# Altium PCB parsa_nami.PcbDoc (part 2 of 3)
Units mm, origin at the board's own origin, x right, y up, seen from the top; angles counter-clockwise.
Board outline 98.55 x 75.06 mm, 2 copper layers (Top Layer, Bottom Layer); 28 components, 23 nets, 118 pads, 19 vias.
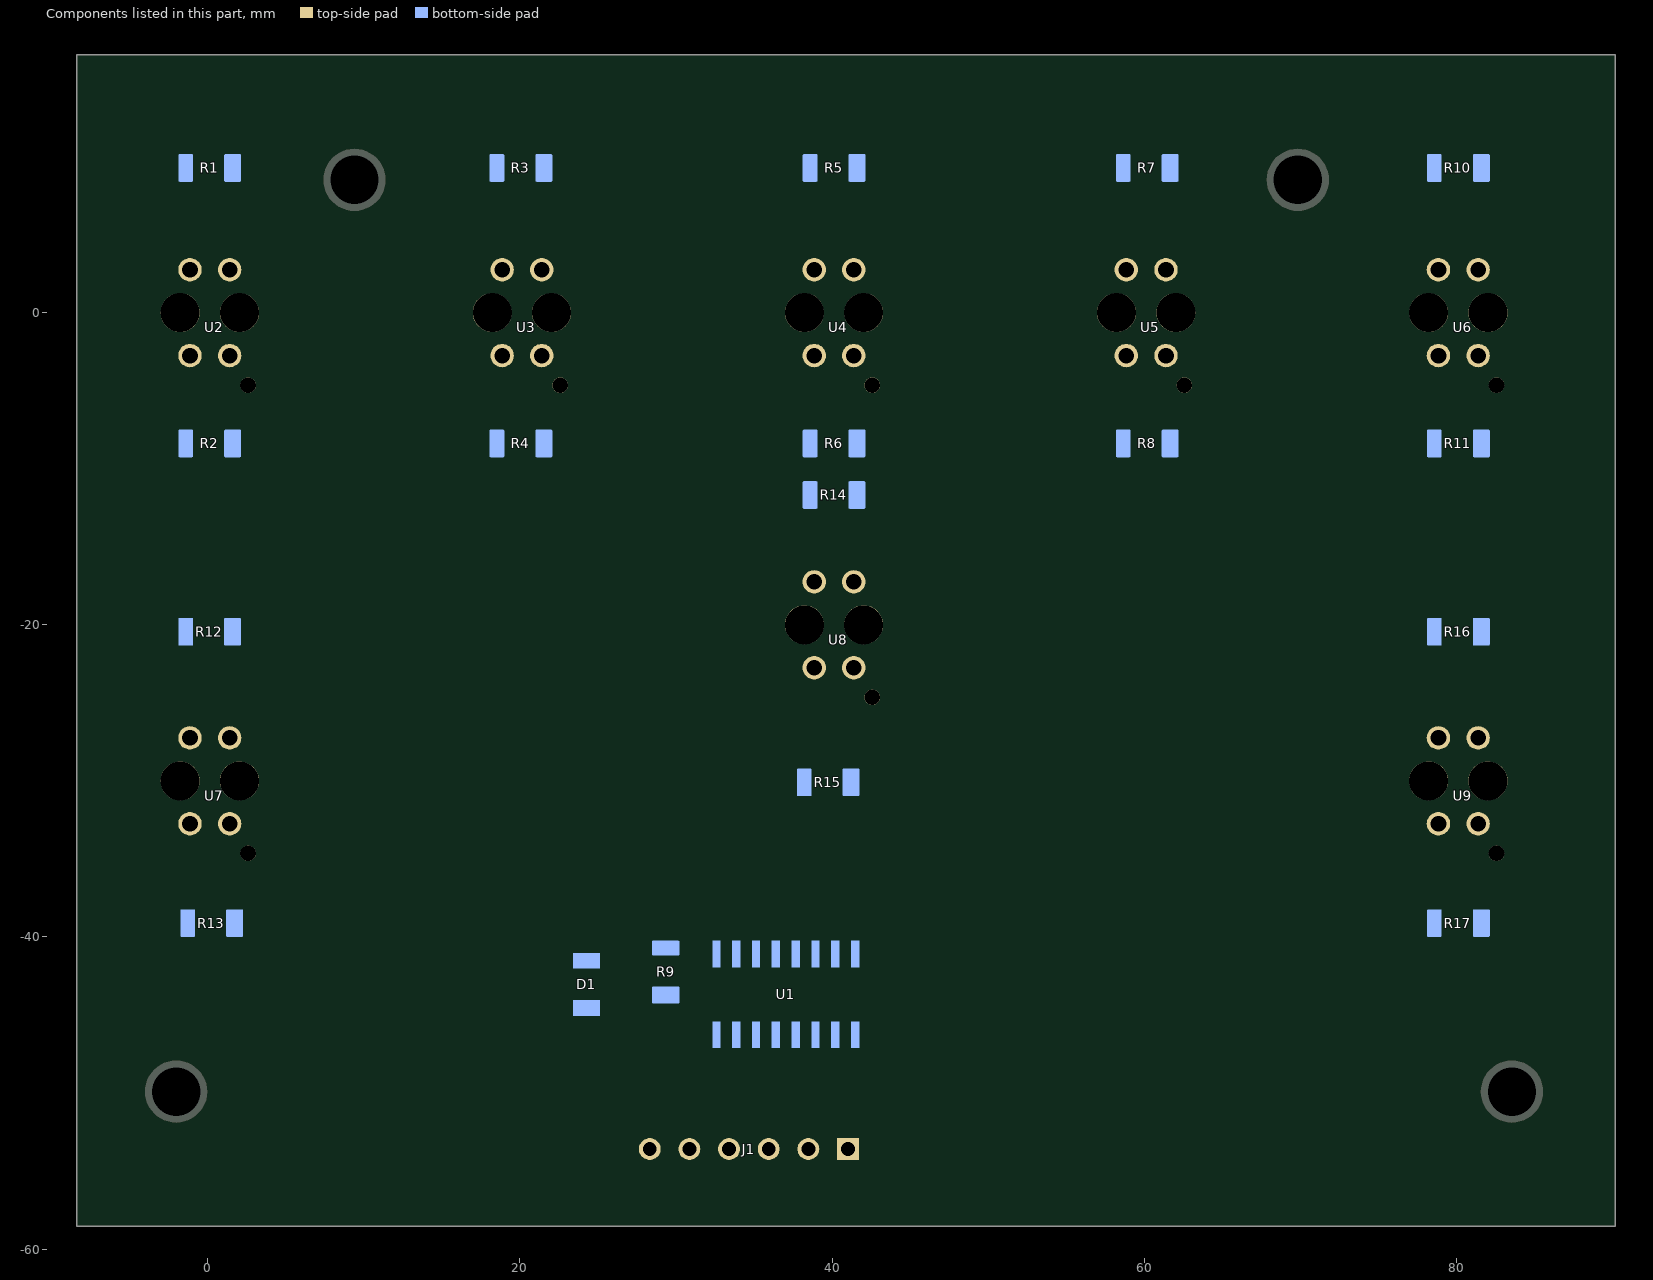
[diagram p2: the components of this part, seen from the top]

## Via types
v1: diameter 1.27, hole 0.711, Top Layer to Bottom Layer, 19 vias

## Nets (pads, with @x,y where several pads share a name; then routed paths per layer and width w, separated by ;. In a path a pad name is that pad's centre, name@x,y a point inside that pad or via, vN(x,y) a via of type N, cw(c..) or ccw(c..) an arc to the next point about the centre after c; other vN are vias at no path point) (continued)
copper on no net: (continued)
  Bottom Layer w0.013: 73.038,-44.818 73.266,-44.818 ; 73.038,-44.806 73.241,-44.806 ; 73.038,-44.793 73.241,-44.793 ; 73.038,-44.78 73.228,-44.78 ; 73.038,-44.767 73.228,-44.767 ; 73.038,-44.755 73.228,-44.755 ; 73.038,-44.742 73.241,-44.742 ; 73.038,-44.729 73.241,-44.729 ; 73.038,-44.717 73.241,-44.717 ; 73.038,-44.704 73.241,-44.704 ; 73.038,-44.691 73.254,-44.691 ; 73.038,-44.679 73.241,-44.679 ; 73.038,-44.666 73.241,-44.666 ; 73.038,-44.653 73.228,-44.653 ; 73.038,-44.64 73.228,-44.64 ; 73.038,-44.628 73.215,-44.628 ; 73.038,-44.615 73.215,-44.615 ; 73.038,-44.602 73.228,-44.602 ; 73.038,-44.59 73.228,-44.59 ; 73.038,-44.577 73.241,-44.577 ; 73.05,-44.996 73.533,-44.996 ; 73.05,-44.983 73.533,-44.983 ; 73.05,-44.971 73.533,-44.971 ; 73.05,-44.958 73.215,-44.958 ; 73.05,-44.945 73.177,-44.945 ; 73.05,-44.933 73.177,-44.933 ; 73.05,-44.92 73.19,-44.92 ; 73.05,-44.907 73.203,-44.907 ; 73.05,-44.895 73.266,-44.895 ; 73.05,-44.882 73.381,-44.882 ; 73.05,-44.869 73.457,-44.869 ; 73.05,-44.856 73.52,-44.856 ; 73.05,-44.844 73.52,-44.844 ; 73.05,-44.831 73.292,-44.831 ; 73.05,-44.564 73.215,-44.564 ; 73.05,-44.552 73.215,-44.552 ; 73.05,-44.539 73.228,-44.539 ; 73.05,-44.526 73.228,-44.526 ; 73.05,-44.514 73.368,-44.514 ; 73.05,-44.501 73.52,-44.501 ; 73.05,-44.488 73.52,-44.488 ; 73.05,-44.475 73.393,-44.475 ; 73.05,-44.463 73.292,-44.463 ; 73.05,-44.45 73.266,-44.45 ; 73.05,-44.437 73.254,-44.437 ; 73.05,-44.425 73.254,-44.425 ; 73.05,-44.412 73.241,-44.412 ; 73.05,-44.399 73.241,-44.399 ; 73.063,-45.11 73.558,-45.11 ; 73.063,-45.098 73.546,-45.098 ; 73.063,-45.085 73.546,-45.085 ; 73.063,-45.072 73.546,-45.072 ; 73.063,-45.06 73.546,-45.06 ; 73.063,-45.047 73.546,-45.047 ; 73.063,-45.034 73.546,-45.034 ; 73.063,-45.021 73.533,-45.021 ; 73.063,-45.009 73.533,-45.009 ; 73.063,-44.386 73.241,-44.386 ; 73.063,-44.374 73.241,-44.374 ; 73.063,-44.361 73.241,-44.361 ; 73.063,-44.348 73.254,-44.348 ; 73.063,-44.336 73.254,-44.336 ; 73.063,-44.323 73.254,-44.323 ; 73.063,-44.31 73.254,-44.31 ; 73.063,-44.298 73.266,-44.298 ; 73.063,-44.285 73.393,-44.285 ; 73.076,-45.187 73.571,-45.187 ; 73.076,-45.174 73.558,-45.174 ; 73.076,-45.161 73.558,-45.161 ; 73.076,-45.148 73.558,-45.148 ; 73.076,-45.136 73.558,-45.136 ; 73.076,-45.123 73.558,-45.123 ; 73.076,-44.272 73.558,-44.272 ; 73.076,-44.259 73.558,-44.259 ; 73.076,-44.247 73.406,-44.247 ; 73.076,-44.234 73.355,-44.234 ; 73.076,-44.221 73.228,-44.221 ; 73.076,-44.209 73.19,-44.209 ; 73.088,-45.263 73.584,-45.263 ; 73.088,-45.25 73.584,-45.25 ; 73.088,-45.237 73.584,-45.237 ; 73.088,-45.225 73.571,-45.225 ; 73.088,-45.212 73.571,-45.212 ; 73.088,-45.199 73.571,-45.199 ; 73.088,-44.196 73.19,-44.196 ; 73.088,-44.183 73.19,-44.183 ; 73.088,-44.171 73.19,-44.171 ; 73.088,-44.158 73.355,-44.158 ; 73.088,-44.145 73.343,-44.145 ; 73.088,-44.133 73.33,-44.133 ; 73.101,-45.326 73.596,-45.326 ; 73.101,-45.314 73.596,-45.314 ; 73.101,-45.301 73.596,-45.301 ; 73.101,-45.288 73.584,-45.288 ; 73.101,-45.276 73.584,-45.276 ; 73.101,-44.12 73.317,-44.12 ; 73.101,-44.107 73.304,-44.107 ; 73.101,-44.094 73.292,-44.094 ; 73.101,-44.082 73.279,-44.082 ; 73.101,-44.069 73.254,-44.069 ; 73.114,-45.377 73.609,-45.377 ; 73.114,-45.364 73.609,-45.364 ; 73.114,-45.352 73.609,-45.352 ; 73.114,-45.339 73.596,-45.339 ; 73.114,-44.056 73.241,-44.056 ; 73.114,-44.044 73.241,-44.044 ; 73.114,-44.031 73.215,-44.031 ; 73.114,-44.018 73.215,-44.018 ; 73.127,-45.428 73.635,-45.428 ; 73.127,-45.415 73.622,-45.415 ; 73.127,-45.402 73.622,-45.402 ; 73.127,-45.39 73.622,-45.39 ; 73.127,-44.005 73.215,-44.005 ; 73.127,-43.993 73.215,-43.993 ; 73.127,-43.98 73.228,-43.98 ; 73.127,-43.967 73.635,-43.967 ; 73.139,-45.479 73.647,-45.479 ; 73.139,-45.466 73.635,-45.466 ; 73.139,-45.453 73.635,-45.453 ; 73.139,-45.441 73.635,-45.441 ; 73.139,-43.955 73.635,-43.955 ; 73.139,-43.942 73.635,-43.942 ; 73.139,-43.929 73.635,-43.929 ; 73.139,-43.917 73.647,-43.917 ; 73.152,-45.517 73.66,-45.517 ; 73.152,-45.504 73.647,-45.504 ; 73.152,-45.491 73.647,-45.491 ; 73.152,-43.904 73.647,-43.904 ; 73.152,-43.891 73.647,-43.891 ; 73.152,-43.878 73.508,-43.878 ; 73.165,-45.568 73.673,-45.568 ; 73.165,-45.555 73.673,-45.555 ; 73.165,-45.542 73.673,-45.542 ; 73.165,-45.529 73.66,-45.529 ; 73.165,-43.866 73.482,-43.866 ; 73.165,-43.853 73.457,-43.853 ; 73.165,-43.84 73.393,-43.84 ; 73.165,-43.828 73.381,-43.828 ; 73.177,-45.606 73.685,-45.606 ; 73.177,-45.593 73.685,-45.593 ; 73.177,-45.58 73.685,-45.58 ; 73.177,-43.815 73.368,-43.815 ; 73.177,-43.802 73.355,-43.802 ; 73.177,-43.79 73.355,-43.79 ; 73.19,-45.644 73.711,-45.644 ; 73.19,-45.631 73.698,-45.631 ; 73.19,-45.618 73.698,-45.618 ; 73.19,-43.777 73.343,-43.777 ; 73.19,-43.764 73.343,-43.764 ; 73.19,-43.752 73.343,-43.752 ; 73.203,-45.682 73.724,-45.682 ; 73.203,-45.669 73.724,-45.669 ; 73.203,-45.657 73.711,-45.657 ; 73.203,-43.739 73.343,-43.739 ; 73.203,-43.726 73.368,-43.726 ; 73.203,-43.713 73.368,-43.713 ; 73.215,-45.72 73.736,-45.72 ; 73.215,-45.707 73.736,-45.707 ; 73.215,-45.695 73.724,-45.695 ; 73.215,-44.907 73.266,-44.907 ; 73.215,-43.701 73.368,-43.701 ; 73.215,-43.688 73.381,-43.688 ; 73.215,-43.675 73.393,-43.675 ; 73.228,-45.745 73.749,-45.745 ; 73.228,-45.733 73.749,-45.733 ; 73.228,-44.171 73.254,-44.171 ; 73.228,-43.663 73.533,-43.663 ; 73.228,-43.65 73.52,-43.65 ; 73.241,-45.783 73.774,-45.783 ; 73.241,-45.771 73.762,-45.771 ; 73.241,-45.758 73.762,-45.758 ; 73.241,-44.958 73.533,-44.958 ; 73.241,-44.945 73.254,-44.945 ; 73.241,-43.637 73.508,-43.637 ; 73.241,-43.624 73.508,-43.624 ; 73.241,-43.612 73.419,-43.612 ; 73.254,-45.809 73.787,-45.809 ; 73.254,-45.796 73.774,-45.796 ; 73.254,-44.92 73.266,-44.92 ; 73.254,-44.526 73.266,-44.526 ; 73.254,-43.98 73.622,-43.98 ; 73.254,-43.599 73.419,-43.599 ; 73.254,-43.586 73.419,-43.586 ; 73.266,-45.847 73.8,-45.847 ; 73.266,-45.834 73.8,-45.834 ; 73.266,-45.822 73.787,-45.822 ; 73.266,-44.628 73.52,-44.628 ; 73.266,-43.574 73.419,-43.574 ; 73.266,-43.561 73.419,-43.561 ; 73.266,-43.548 73.431,-43.548 ; 73.279,-45.872 73.812,-45.872 ; 73.279,-45.86 73.812,-45.86 ; 73.279,-44.895 73.317,-44.895 ; 73.279,-44.767 73.52,-44.767 ; 73.279,-44.755 73.52,-44.755 ; 73.279,-44.742 73.52,-44.742 ; 73.279,-44.729 73.52,-44.729 ; 73.279,-44.64 73.419,-44.64 ; 73.279,-44.615 73.52,-44.615 ; 73.279,-44.602 73.52,-44.602 ; 73.279,-44.59 73.52,-44.59 ; 73.279,-44.386 73.317,-44.386 ; 73.279,-44.298 73.368,-44.298 ; 73.279,-43.536 73.431,-43.536 ; 73.279,-43.523 73.431,-43.523 ; 73.292,-45.898 73.825,-45.898 ; 73.292,-45.885 73.825,-45.885 ; 73.292,-44.78 73.317,-44.78 ; 73.292,-44.717 73.52,-44.717 ; 73.292,-44.577 73.317,-44.577 ; 73.292,-44.399 73.317,-44.399 ; 73.292,-44.374 73.317,-44.374 ; 73.292,-44.361 73.33,-44.361 ; 73.292,-44.348 73.33,-44.348 ; 73.292,-44.31 73.355,-44.31 ; 73.292,-44.171 73.368,-44.171 ; 73.292,-43.51 73.444,-43.51 ; 73.292,-43.497 73.457,-43.497 ; 73.304,-45.936 73.8,-45.936 ; 73.304,-45.923 73.812,-45.923 ; 73.304,-45.91 73.812,-45.91 ; 73.304,-44.336 73.33,-44.336 ; 73.304,-44.323 73.343,-44.323 ; 73.304,-43.993 73.622,-43.993 ; 73.304,-43.485 73.469,-43.485 ; 73.304,-43.472 73.838,-43.472 ; 73.304,-43.459 73.698,-43.459 ; 73.317,-45.961 73.787,-45.961 ; 73.317,-45.949 73.8,-45.949 ; 73.317,-44.945 73.343,-44.945 ; 73.317,-44.831 73.355,-44.831 ; 73.317,-44.463 73.33,-44.463 ; 73.317,-44.056 73.368,-44.056 ; 73.317,-43.447 73.495,-43.447 ; 73.317,-43.434 73.482,-43.434 ; 73.33,-45.987 73.787,-45.987 ; 73.33,-45.974 73.787,-45.974 ; 73.33,-44.704 73.368,-44.704 ; 73.33,-44.577 73.52,-44.577 ; 73.33,-44.069 73.431,-44.069 ; 73.33,-43.421 73.482,-43.421 ; 73.33,-43.409 73.482,-43.409 ; 73.343,-46.012 73.774,-46.012 ; 73.343,-45.999 73.787,-45.999 ; 73.343,-43.396 73.482,-43.396 ; 73.343,-43.383 73.495,-43.383 ; 73.355,-46.038 73.774,-46.038 ; 73.355,-46.025 73.774,-46.025 ; 73.355,-44.945 73.533,-44.945 ; 73.355,-44.78 73.368,-44.78 ; 73.355,-44.183 73.381,-44.183 ; 73.355,-44.082 73.495,-44.082 ; 73.355,-43.37 73.533,-43.37 ; 73.355,-43.358 73.52,-43.358 ; 73.368,-46.063 73.762,-46.063 ; 73.368,-46.05 73.774,-46.05 ; 73.368,-44.412 73.406,-44.412 ; 73.368,-44.399 73.419,-44.399 ; 73.368,-44.386 73.419,-44.386 ; 73.368,-44.107 73.584,-44.107 ; 73.368,-44.094 73.596,-44.094 ; 73.368,-44.005 73.622,-44.005 ; 73.368,-43.345 73.52,-43.345 ; 73.368,-43.332 73.52,-43.332 ; 73.381,-46.088 73.762,-46.088 ; 73.381,-46.076 73.762,-46.076 ; 73.381,-44.933 73.406,-44.933 ; 73.381,-44.831 73.419,-44.831 ; 73.381,-44.704 73.52,-44.704 ; 73.381,-44.514 73.419,-44.514 ; 73.381,-44.374 73.431,-44.374 ; 73.381,-44.361 73.431,-44.361 ; 73.381,-44.348 73.419,-44.348 ; 73.381,-44.12 73.584,-44.12 ; 73.381,-43.32 73.647,-43.32 ; 73.381,-43.307 73.635,-43.307 ; 73.393,-46.101 73.762,-46.101 ; 73.393,-43.777 73.431,-43.777 ; 73.393,-43.764 73.431,-43.764 ; 73.393,-43.752 73.431,-43.752 ; 73.393,-43.294 73.622,-43.294 ; 73.406,-46.126 73.749,-46.126 ; 73.406,-46.114 73.749,-46.114 ; 73.406,-44.882 73.419,-44.882 ; 73.406,-44.475 73.533,-44.475 ; 73.406,-44.285 73.558,-44.285 ; 73.406,-44.133 73.584,-44.133 ; 73.406,-43.79 73.431,-43.79 ; 73.406,-43.675 73.546,-43.675 ; 73.406,-43.282 73.596,-43.282 ; 73.406,-43.269 73.584,-43.269 ; 73.419,-46.152 73.749,-46.152 ; 73.419,-46.139 73.749,-46.139 ; 73.419,-44.933 73.533,-44.933 ; 73.419,-44.564 73.444,-44.564 ; 73.419,-44.145 73.584,-44.145 ; 73.419,-43.739 73.444,-43.739 ; 73.419,-43.726 73.457,-43.726 ; 73.419,-43.256 73.584,-43.256 ; 73.419,-43.243 73.596,-43.243 ; 73.431,-46.177 73.736,-46.177 ; 73.431,-46.164 73.736,-46.164 ; 73.431,-44.831 73.52,-44.831 ; 73.431,-44.64 73.52,-44.64 ; 73.431,-44.158 73.584,-44.158 ; 73.431,-44.018 73.609,-44.018 ; 73.431,-43.713 73.457,-43.713 ; 73.431,-43.701 73.482,-43.701 ; 73.431,-43.688 73.508,-43.688 ; 73.431,-43.231 73.596,-43.231 ; 73.431,-43.218 73.596,-43.218 ; 73.444,-46.203 73.736,-46.203 ; 73.444,-46.19 73.736,-46.19 ; 73.444,-44.539 73.52,-44.539 ; 73.444,-44.526 73.52,-44.526 ; 73.444,-44.514 73.52,-44.514 ; 73.444,-44.298 73.546,-44.298 ; 73.444,-44.171 73.571,-44.171 ; 73.444,-43.205 73.596,-43.205 ; 73.444,-43.193 73.609,-43.193 ; 73.457,-46.215 73.724,-46.215 ; 73.457,-44.92 73.469,-44.92 ; 73.457,-44.793 73.52,-44.793 ; 73.457,-44.78 73.52,-44.78 ; 73.457,-44.691 73.52,-44.691 ; 73.457,-44.679 73.52,-44.679 ; 73.457,-44.666 73.52,-44.666 ; 73.457,-44.653 73.52,-44.653 ; 73.457,-44.564 73.52,-44.564 ; 73.457,-44.552 73.52,-44.552 ; 73.457,-44.463 73.533,-44.463 ; 73.457,-44.425 73.533,-44.425 ; 73.457,-44.412 73.533,-44.412 ; 73.457,-44.31 73.546,-44.31 ; 73.457,-44.183 73.571,-44.183 ; 73.457,-43.18 73.622,-43.18 ; 73.469,-46.241 73.724,-46.241 ; 73.469,-46.228 73.724,-46.228 ; 73.469,-44.869 73.52,-44.869 ; 73.469,-44.818 73.52,-44.818 ; 73.469,-44.806 73.52,-44.806 ; 73.469,-44.45 73.533,-44.45 ; 73.469,-44.437 73.533,-44.437 ; 73.469,-44.399 73.533,-44.399 ; 73.469,-44.361 73.546,-44.361 ; 73.469,-44.348 73.546,-44.348 ; 73.469,-44.336 73.546,-44.336 ; 73.469,-44.323 73.546,-44.323 ; 73.469,-43.802 73.508,-43.802 ; 73.469,-43.612 73.508,-43.612 ; 73.469,-43.599 73.508,-43.599 ; 73.469,-43.586 73.508,-43.586 ; 73.469,-43.574 73.508,-43.574 ; 73.469,-43.167 73.622,-43.167 ; 73.469,-43.155 73.635,-43.155 ; 73.482,-46.253 73.711,-46.253 ; 73.482,-44.92 73.533,-44.92 ; 73.482,-44.907 73.52,-44.907 ; 73.482,-44.895 73.52,-44.895 ; 73.482,-44.882 73.52,-44.882 ; 73.482,-44.386 73.533,-44.386 ; 73.482,-44.374 73.533,-44.374 ; 73.482,-44.247 73.558,-44.247 ; 73.482,-44.234 73.558,-44.234 ; 73.482,-44.221 73.558,-44.221 ; 73.482,-44.209 73.571,-44.209 ; 73.482,-44.196 73.571,-44.196 ; 73.482,-43.79 73.533,-43.79 ; 73.482,-43.777 73.533,-43.777 ; 73.482,-43.764 73.533,-43.764 ; 73.482,-43.561 73.52,-43.561 ; 73.482,-43.548 73.52,-43.548 ; 73.482,-43.142 74.066,-43.142 ; 73.495,-46.279 73.711,-46.279 ; 73.495,-46.266 73.711,-46.266 ; 73.495,-44.031 73.609,-44.031 ; 73.495,-43.752 73.533,-43.752 ; 73.495,-43.536 73.508,-43.536 ; 73.495,-43.129 74.079,-43.129 ; 73.495,-43.116 74.092,-43.116 ; 73.508,-46.304 73.698,-46.304 ; 73.508,-46.291 73.711,-46.291 ; 73.508,-44.082 73.596,-44.082 ; 73.508,-44.044 73.609,-44.044 ; 73.508,-43.739 73.533,-43.739 ; 73.508,-43.104 73.724,-43.104 ; 73.508,-43.091 73.711,-43.091 ; 73.52,-46.317 73.698,-46.317 ; 73.52,-44.069 73.596,-44.069 ; 73.52,-44.056 73.596,-44.056 ; 73.52,-43.447 73.685,-43.447 ; 73.52,-43.078 73.698,-43.078 ; 73.533,-46.342 73.685,-46.342 ; 73.533,-46.33 73.698,-46.33 ; 73.533,-43.688 73.736,-43.688 ; 73.533,-43.485 73.838,-43.485 ; 73.533,-43.434 73.66,-43.434 ; 73.533,-43.421 73.622,-43.421 ; 73.533,-43.066 73.685,-43.066 ; 73.533,-43.053 73.673,-43.053 ; 73.546,-46.355 73.685,-46.355 ; 73.546,-43.84 73.673,-43.84 ; 73.546,-43.51 73.825,-43.51 ; 73.546,-43.497 73.825,-43.497 ; 73.546,-43.409 73.609,-43.409 ; 73.546,-43.04 73.673,-43.04 ; 73.558,-46.38 73.673,-46.38 ; 73.558,-46.368 73.685,-46.368 ; 73.558,-43.878 73.66,-43.878 ; 73.558,-43.866 73.66,-43.866 ; 73.558,-43.853 73.673,-43.853 ; 73.558,-43.828 73.673,-43.828 ; 73.558,-43.701 73.724,-43.701 ; 73.558,-43.624 73.584,-43.624 ; 73.558,-43.612 73.596,-43.612 ; 73.558,-43.599 73.609,-43.599 ; 73.558,-43.586 73.609,-43.586 ; 73.558,-43.548 73.609,-43.548 ; 73.558,-43.536 73.609,-43.536 ; 73.558,-43.523 73.812,-43.523 ; 73.558,-43.028 73.66,-43.028 ; 73.558,-43.015 73.66,-43.015 ; 73.571,-46.393 73.673,-46.393 ; 73.571,-43.815 73.685,-43.815 ; 73.571,-43.713 73.724,-43.713 ; 73.571,-43.574 73.622,-43.574 ; 73.571,-43.561 73.622,-43.561 ; 73.571,-43.332 73.685,-43.332 ; 73.571,-43.002 73.673,-43.002 ; 73.584,-46.406 73.673,-46.406 ; 73.584,-43.802 73.685,-43.802 ; 73.584,-43.79 73.685,-43.79 ; 73.584,-43.777 73.698,-43.777 ; 73.584,-43.764 73.698,-43.764 ; 73.584,-43.739 73.711,-43.739 ; 73.584,-43.726 73.724,-43.726 ; 73.584,-43.675 73.596,-43.675 ; 73.584,-42.989 73.673,-42.989 ; 73.596,-46.431 73.66,-46.431 ; 73.596,-46.419 73.66,-46.419 ; 73.596,-43.752 73.711,-43.752 ; 73.596,-43.345 73.698,-43.345 ; 73.596,-42.977 73.685,-42.977 ; 73.596,-42.964 73.685,-42.964 ; 73.609,-46.444 73.647,-46.444 ; 73.609,-43.675 73.736,-43.675 ; 73.609,-42.951 73.698,-42.951 ; 73.622,-46.469 73.647,-46.469 ; 73.622,-46.457 73.647,-46.457 ; 73.622,-43.663 73.749,-43.663 ; 73.622,-43.358 73.711,-43.358 ; 73.622,-42.939 73.711,-42.939 ; 73.622,-42.926 73.711,-42.926 ; 73.635,-43.65 73.749,-43.65 ; 73.635,-43.37 73.736,-43.37 ; 73.635,-42.913 73.724,-42.913 ; 73.647,-43.637 73.762,-43.637 ; 73.647,-43.624 73.762,-43.624 ; 73.647,-43.612 73.774,-43.612 ; 73.647,-43.256 73.673,-43.256 ; 73.647,-43.243 73.685,-43.243 ; 73.647,-43.231 73.685,-43.231 ; 73.647,-43.218 73.698,-43.218 ; 73.647,-42.901 73.724,-42.901 ; 73.66,-43.599 73.774,-43.599 ; 73.66,-43.586 73.787,-43.586 ; 73.66,-43.561 73.8,-43.561 ; 73.66,-43.548 73.8,-43.548 ; 73.66,-43.536 73.812,-43.536 ; 73.66,-43.205 73.698,-43.205 ; 73.66,-42.888 74.308,-42.888 ; 73.673,-43.574 73.787,-43.574 ; 73.673,-43.383 73.749,-43.383 ; 73.673,-43.193 73.736,-43.193 ; 73.673,-42.875 74.32,-42.875 ; 73.673,-42.862 74.333,-42.862 ; 73.685,-43.396 73.889,-43.396 ; 73.685,-43.18 73.749,-43.18 ; 73.685,-43.167 74.054,-43.167 ; 73.685,-43.155 74.054,-43.155 ; 73.685,-42.85 74.346,-42.85 ; 73.698,-43.294 73.749,-43.294 ; 73.698,-42.837 74.358,-42.837 ; 73.711,-43.459 73.85,-43.459 ; 73.711,-43.282 73.762,-43.282 ; 73.711,-42.824 74.384,-42.824 ; 73.724,-43.447 73.863,-43.447 ; 73.724,-43.409 73.876,-43.409 ; 73.724,-43.269 73.787,-43.269 ; 73.724,-43.256 73.787,-43.256 ; 73.724,-43.04 73.8,-43.04 ; 73.724,-43.028 73.812,-43.028 ; 73.724,-43.015 73.825,-43.015 ; 73.724,-43.002 73.825,-43.002 ; 73.724,-42.812 74.397,-42.812 ; 73.724,-42.799 74.409,-42.799 ; 73.736,-43.434 73.863,-43.434 ; 73.736,-43.421 73.876,-43.421 ; 73.736,-43.243 73.774,-43.243 ; 73.736,-43.053 73.774,-43.053 ; 73.736,-42.989 73.8,-42.989 ; 73.736,-42.977 73.787,-42.977 ; 73.736,-42.786 74.422,-42.786 ; 73.749,-43.231 73.762,-43.231 ; 73.749,-42.964 73.774,-42.964 ; 73.749,-42.774 74.435,-42.774 ; 73.762,-42.761 74.447,-42.761 ; 73.774,-43.383 73.901,-43.383 ; 73.774,-43.37 73.901,-43.37 ; 73.774,-43.358 73.914,-43.358 ; 73.774,-43.345 73.927,-43.345 ; 73.774,-43.18 74.041,-43.18 ; 73.774,-42.901 74.295,-42.901 ; 73.774,-42.748 74.473,-42.748 ; 73.787,-43.332 73.927,-43.332 ; 73.787,-42.735 74.486,-42.735 ; 73.8,-43.32 73.939,-43.32 ; 73.8,-43.193 74.028,-43.193 ; 73.8,-43.104 74.105,-43.104 ; 73.8,-42.926 74.27,-42.926 ; 73.8,-42.913 74.282,-42.913 ; 73.8,-42.723 74.498,-42.723 ; 73.812,-43.307 73.952,-43.307 ; 73.812,-43.294 73.952,-43.294 ; 73.812,-43.205 74.016,-43.205 ; 73.812,-43.091 73.939,-43.091 ; 73.812,-42.71 74.524,-42.71 ; 73.812,-42.697 74.536,-42.697 ; 73.825,-43.231 74.003,-43.231 ; 73.825,-43.218 74.016,-43.218 ; 73.825,-42.939 74.257,-42.939 ; 73.825,-42.685 74.549,-42.685 ; 73.838,-43.282 73.965,-43.282 ; 73.838,-43.269 73.977,-43.269 ; 73.838,-43.256 73.977,-43.256 ; 73.838,-43.243 73.99,-43.243 ; 73.838,-43.078 73.914,-43.078 ; 73.838,-42.672 74.574,-42.672 ; 73.85,-43.066 73.914,-43.066 ; 73.85,-42.951 74.244,-42.951 ; 73.85,-42.659 74.587,-42.659 ; 73.863,-43.053 73.889,-43.053 ; 73.863,-43.04 73.876,-43.04 ; 73.863,-42.977 74.219,-42.977 ; 73.863,-42.964 74.231,-42.964 ; 73.863,-42.647 74.612,-42.647 ; 73.876,-42.634 74.625,-42.634 ; 73.889,-42.989 74.206,-42.989 ; 73.889,-42.621 74.651,-42.621 ; 73.901,-42.608 74.663,-42.608 ; 73.914,-43.002 74.193,-43.002 ; 73.914,-42.596 74.676,-42.596 ; 73.927,-47.142 74.498,-47.142 ; 73.927,-47.13 74.524,-47.13 ; 73.927,-47.117 74.549,-47.117 ; 73.927,-47.104 74.574,-47.104 ; 73.927,-47.092 74.612,-47.092 ; 73.927,-47.079 74.625,-47.079 ; 73.927,-47.066 74.663,-47.066 ; 73.927,-47.053 74.689,-47.053 ; 73.927,-47.041 74.714,-47.041 ; 73.927,-47.028 74.752,-47.028 ; 73.927,-47.015 74.778,-47.015 ; 73.927,-47.003 74.79,-47.003 ; 73.927,-43.015 74.181,-43.015 ; 73.927,-42.583 74.676,-42.583 ; 73.939,-47.155 74.46,-47.155 ; 73.939,-46.99 74.803,-46.99 ; 73.939,-46.977 74.828,-46.977 ; 73.939,-46.965 74.841,-46.965 ; 73.939,-46.952 74.854,-46.952 ; 73.939,-46.939 74.879,-46.939 ; 73.939,-46.926 74.892,-46.926 ; 73.939,-46.914 74.917,-46.914 ; 73.939,-46.901 74.93,-46.901 ; 73.939,-46.888 74.943,-46.888 ; 73.939,-46.876 74.981,-46.876 ; 73.939,-46.863 74.993,-46.863 ; 73.939,-46.85 75.019,-46.85 ; 73.939,-46.838 75.032,-46.838 ; 73.939,-46.825 75.07,-46.825 ; 73.939,-46.812 75.082,-46.812 ; 73.939,-46.799 75.095,-46.799 ; 73.939,-46.787 75.108,-46.787 ; 73.939,-46.774 75.108,-46.774 ; 73.939,-46.761 75.12,-46.761 ; 73.939,-46.749 75.133,-46.749 ; 73.939,-46.736 75.159,-46.736 ; 73.939,-46.723 75.171,-46.723 ; 73.939,-46.711 75.197,-46.711 ; 73.939,-46.698 76.34,-46.698 ; 73.939,-46.685 76.34,-46.685 ; 73.939,-46.672 76.34,-46.672 ; 73.939,-46.66 76.34,-46.66 ; 73.939,-46.647 76.352,-46.647 ; 73.939,-46.634 76.352,-46.634 ; 73.939,-46.622 76.352,-46.622 ; 73.939,-46.609 76.365,-46.609 ; 73.939,-46.596 76.365,-46.596 ; 73.939,-46.584 76.365,-46.584 ; 73.939,-46.571 76.365,-46.571 ; 73.939,-46.558 76.365,-46.558 ; 73.939,-46.545 76.365,-46.545 ; 73.939,-46.533 76.365,-46.533 ; 73.939,-46.52 76.365,-46.52 ; 73.939,-46.507 76.365,-46.507 ; 73.939,-46.495 76.365,-46.495 ; 73.939,-46.482 76.365,-46.482 ; 73.939,-46.469 76.365,-46.469 ; 73.939,-46.457 76.378,-46.457 ; 73.939,-46.444 76.378,-46.444 ; 73.939,-46.431 76.378,-46.431 ; 73.939,-46.419 76.378,-46.419 ; 73.939,-43.028 74.168,-43.028 ; 73.939,-42.57 74.676,-42.57 ; 73.952,-47.206 74.346,-47.206 ; 73.952,-47.193 74.384,-47.193 ; 73.952,-47.18 74.409,-47.18 ; 73.952,-47.168 74.435,-47.168 ; 73.952,-46.406 76.378,-46.406 ; 73.952,-46.393 76.378,-46.393 ; 73.952,-46.38 76.378,-46.38 ; 73.952,-46.368 76.378,-46.368 ; 73.952,-46.355 76.378,-46.355 ; 73.952,-42.558 74.676,-42.558 ; 73.965,-47.231 74.282,-47.231 ; 73.965,-47.219 74.32,-47.219 ; 73.965,-46.342 76.378,-46.342 ; 73.965,-46.33 76.378,-46.33 ; 73.965,-46.317 76.391,-46.317 ; 73.965,-46.304 76.391,-46.304 ; 73.965,-46.291 76.391,-46.291 ; 73.965,-46.279 76.391,-46.279 ; 73.965,-46.266 76.403,-46.266 ; 73.965,-46.253 76.403,-46.253 ; 73.965,-43.091 74.117,-43.091 ; 73.965,-43.078 74.117,-43.078 ; 73.965,-43.04 74.155,-43.04 ; 73.965,-42.545 74.676,-42.545 ; 73.977,-47.244 74.257,-47.244 ; 73.977,-46.241 76.403,-46.241 ; 73.977,-46.228 76.403,-46.228 ; 73.977,-46.215 76.403,-46.215 ; 73.977,-46.203 76.403,-46.203 ; 73.977,-46.19 76.403,-46.19 ; 73.977,-46.177 76.403,-46.177 ; 73.977,-46.164 76.416,-46.164 ; 73.977,-46.139 76.416,-46.139 ; 73.977,-46.126 74.867,-46.126 ; 73.977,-43.066 74.13,-43.066 ; 73.977,-43.053 74.143,-43.053 ; 73.977,-42.532 74.676,-42.532 ; 73.99,-47.257 74.219,-47.257 ; 73.99,-46.152 76.416,-46.152 ; 73.99,-46.114 74.841,-46.114 ; 73.99,-46.101 74.816,-46.101 ; 73.99,-46.088 74.803,-46.088 ; 73.99,-46.076 74.803,-46.076 ; 73.99,-46.063 74.79,-46.063 ; 73.99,-46.05 74.79,-46.05 ; 73.99,-46.038 74.79,-46.038 ; 73.99,-42.52 74.676,-42.52 ; 74.003,-47.269 74.181,-47.269 ; 74.003,-46.025 74.79,-46.025 ; 74.003,-46.012 74.79,-46.012 ; 74.003,-45.999 74.79,-45.999 ; 74.003,-45.987 74.79,-45.987 ; 74.003,-45.974 74.79,-45.974 ; 74.016,-45.961 74.79,-45.961 ; 74.016,-45.949 74.79,-45.949 ; 74.016,-45.936 74.79,-45.936 ; 74.016,-45.923 74.79,-45.923 ; 74.016,-45.91 74.79,-45.91 ; 74.016,-42.507 74.689,-42.507 ; 74.028,-45.898 74.79,-45.898 ; 74.028,-45.885 74.79,-45.885 ; 74.028,-45.872 74.79,-45.872 ; 74.028,-45.86 74.803,-45.86 ; 74.028,-45.847 74.79,-45.847 ; 74.028,-42.494 74.689,-42.494 ; 74.041,-47.282 74.13,-47.282 ; 74.041,-45.834 74.803,-45.834 ; 74.041,-45.822 74.803,-45.822 ; 74.041,-45.809 74.803,-45.809 ; 74.041,-45.796 74.803,-45.796 ; 74.041,-45.783 74.803,-45.783 ; 74.041,-45.771 74.816,-45.771 ; 74.041,-45.758 74.816,-45.758 ; 74.041,-42.481 74.689,-42.481 ; 74.054,-45.745 74.816,-45.745 ; 74.054,-45.733 74.816,-45.733 ; 74.054,-45.72 74.828,-45.72 ; 74.054,-45.707 74.828,-45.707 ; 74.054,-45.695 74.828,-45.695 ; 74.054,-42.469 74.689,-42.469 ; 74.066,-45.682 74.841,-45.682 ; 74.066,-45.669 74.841,-45.669 ; 74.066,-45.657 74.854,-45.657 ; 74.066,-42.456 74.689,-42.456 ; 74.079,-45.644 74.854,-45.644 ; 74.079,-45.631 74.854,-45.631 ; 74.079,-45.618 74.854,-45.618 ; 74.079,-45.606 74.854,-45.606 ; 74.079,-45.593 74.854,-45.593 ; 74.079,-45.58 74.867,-45.58 ; 74.079,-45.568 74.867,-45.568 ; 74.079,-42.443 74.701,-42.443 ; 74.092,-45.555 74.867,-45.555 ; 74.092,-45.542 74.879,-45.542 ; 74.092,-42.431 74.701,-42.431 ; 74.105,-45.529 74.879,-45.529 ; 74.105,-45.517 74.879,-45.517 ; 74.105,-45.504 74.879,-45.504 ; 74.105,-45.491 74.879,-45.491 ; 74.105,-45.479 74.892,-45.479 ; 74.117,-45.466 74.892,-45.466 ; 74.117,-45.453 74.892,-45.453 ; 74.117,-45.441 74.892,-45.441 ; 74.117,-45.428 74.905,-45.428 ; 74.117,-42.418 74.701,-42.418 ; 74.13,-45.415 74.905,-45.415 ; 74.13,-45.402 74.905,-45.402 ; 74.13,-45.39 74.905,-45.39 ; 74.13,-42.405 74.714,-42.405 ; 74.143,-45.377 74.905,-45.377 ; 74.143,-45.364 74.905,-45.364 ; 74.143,-45.352 74.917,-45.352 ; 74.143,-45.339 74.917,-45.339 ; 74.143,-45.326 74.917,-45.326 ; 74.143,-42.393 74.714,-42.393 ; 74.155,-45.314 74.917,-45.314 ; 74.155,-45.301 74.93,-45.301 ; 74.155,-45.288 74.93,-45.288 ; 74.155,-42.38 74.727,-42.38 ; 74.168,-45.276 74.93,-45.276 ; 74.168,-45.263 74.93,-45.263 ; 74.168,-45.25 74.93,-45.25 ; 74.168,-45.237 74.93,-45.237 ; 74.181,-45.225 74.943,-45.225 ; 74.181,-45.212 74.943,-45.212 ; 74.181,-45.199 74.943,-45.199 ; 74.181,-45.187 74.943,-45.187 ; 74.181,-45.174 74.943,-45.174 ; 74.181,-42.367 74.727,-42.367 ; 74.193,-45.161 74.955,-45.161 ; 74.193,-45.148 74.955,-45.148 ; 74.193,-45.136 74.955,-45.136 ; 74.193,-45.123 74.955,-45.123 ; 74.193,-45.11 74.955,-45.11 ; 74.193,-42.355 74.739,-42.355 ; 74.206,-45.098 74.968,-45.098 ; 74.206,-45.085 74.968,-45.085 ; 74.206,-45.072 74.968,-45.072 ; 74.206,-42.342 74.739,-42.342 ; 74.219,-45.06 74.968,-45.06 ; 74.219,-45.047 74.968,-45.047 ; 74.219,-45.034 74.981,-45.034 ; 74.219,-45.021 74.981,-45.021 ; 74.219,-42.329 74.739,-42.329 ; 74.231,-45.009 74.981,-45.009 ; 74.231,-44.996 74.993,-44.996 ; 74.231,-44.983 74.993,-44.983 ; 74.231,-44.971 74.993,-44.971 ; 74.231,-44.958 74.993,-44.958 ; 74.244,-44.945 74.993,-44.945 ; 74.244,-44.933 74.993,-44.933 ; 74.244,-44.92 75.006,-44.92 ; 74.244,-42.316 74.752,-42.316 ; 74.257,-44.907 75.006,-44.907 ; 74.257,-44.895 75.006,-44.895 ; 74.257,-44.882 75.006,-44.882 ; 74.257,-44.869 75.006,-44.869 ; 74.257,-42.304 74.752,-42.304 ; 74.27,-44.856 75.019,-44.856 ; 74.27,-44.844 75.019,-44.844 ; 74.27,-44.831 75.019,-44.831 ; 74.27,-44.818 75.019,-44.818 ; 74.27,-44.806 75.019,-44.806 ; 74.27,-44.793 75.032,-44.793 ; 74.27,-44.78 75.032,-44.78 ; 74.282,-44.767 75.032,-44.767 ; 74.282,-44.755 75.044,-44.755 ; 74.282,-44.742 75.044,-44.742 ; 74.282,-44.729 75.044,-44.729 ; 74.282,-44.717 75.057,-44.717 ; 74.282,-42.291 74.765,-42.291 ; 74.295,-44.704 75.057,-44.704 ; 74.295,-44.691 75.057,-44.691 ; 74.295,-44.679 75.057,-44.679 ; 74.295,-44.666 75.07,-44.666 ; 74.295,-44.653 75.07,-44.653 ; 74.295,-44.64 75.07,-44.64 ; 74.295,-42.278 74.765,-42.278 ; 74.308,-44.628 75.07,-44.628 ; 74.308,-44.615 75.07,-44.615 ; 74.308,-44.602 75.082,-44.602 ; 74.308,-44.59 75.082,-44.59 ; 74.308,-44.577 75.082,-44.577 ; 74.308,-42.266 74.765,-42.266 ; 74.32,-44.564 75.082,-44.564 ; 74.32,-44.552 75.095,-44.552 ; 74.32,-44.539 75.095,-44.539 ; 74.32,-44.526 75.095,-44.526 ; 74.32,-44.514 75.095,-44.514 ; 74.32,-44.501 75.095,-44.501 ; 74.32,-44.475 75.108,-44.475 ; 74.32,-44.463 75.108,-44.463 ; 74.32,-44.45 75.108,-44.45 ; 74.32,-44.437 75.12,-44.437 ; 74.333,-44.488 75.108,-44.488 ; 74.333,-44.425 75.12,-44.425 ; 74.333,-44.412 75.12,-44.412 ; 74.333,-44.399 75.12,-44.399 ; 74.333,-44.386 75.133,-44.386 ; 74.333,-44.374 75.133,-44.374 ; 74.333,-42.253 74.778,-42.253 ; 74.346,-44.361 75.133,-44.361 ; 74.346,-44.348 75.146,-44.348 ; 74.346,-44.336 75.146,-44.336 ; 74.346,-42.24 74.778,-42.24 ; 74.358,-44.323 75.146,-44.323 ; 74.358,-44.31 75.159,-44.31 ; 74.358,-44.298 75.159,-44.298 ; 74.358,-44.285 75.159,-44.285 ; 74.358,-44.272 75.159,-44.272 ; 74.371,-44.259 75.171,-44.259 ; 74.371,-44.247 75.171,-44.247 ; 74.371,-44.234 75.184,-44.234 ; 74.371,-44.221 75.184,-44.221 ; 74.371,-44.209 75.184,-44.209 ; 74.371,-42.227 74.79,-42.227 ; 74.384,-44.196 75.184,-44.196 ; 74.384,-44.183 75.197,-44.183 ; 74.384,-44.171 75.197,-44.171 ; 74.384,-44.158 75.197,-44.158 ; 74.384,-44.145 75.184,-44.145 ; 74.384,-44.133 75.184,-44.133 ; 74.384,-44.12 75.197,-44.12 ; 74.384,-42.215 74.79,-42.215 ; 74.397,-44.107 75.197,-44.107 ; 74.397,-44.094 75.197,-44.094 ; 74.397,-44.082 75.209,-44.082 ; 74.397,-44.069 75.197,-44.069 ; 74.397,-44.056 75.184,-44.056 ; 74.397,-44.044 75.171,-44.044 ; 74.397,-44.031 75.159,-44.031 ; 74.409,-44.018 75.146,-44.018 ; 74.409,-44.005 75.133,-44.005 ; 74.409,-43.993 75.12,-43.993 ; 74.409,-43.98 75.095,-43.98 ; 74.409,-43.967 75.082,-43.967 ; 74.409,-42.202 74.803,-42.202 ; 74.422,-43.955 75.07,-43.955 ; 74.422,-43.942 75.057,-43.942 ; 74.422,-43.929 75.032,-43.929 ; 74.422,-43.917 75.019,-43.917 ; 74.422,-43.904 75.006,-43.904 ; 74.435,-43.891 74.981,-43.891 ; 74.435,-43.878 74.968,-43.878 ; 74.435,-43.866 74.955,-43.866 ; 74.435,-43.853 74.943,-43.853 ; 74.435,-43.84 74.93,-43.84 ; 74.435,-43.828 74.917,-43.828 ; 74.435,-42.189 74.803,-42.189 ; 74.447,-43.815 74.905,-43.815 ; 74.447,-43.802 74.892,-43.802 ; 74.447,-43.79 74.879,-43.79 ; 74.447,-43.777 74.867,-43.777 ; 74.447,-43.764 74.854,-43.764 ; 74.447,-43.752 74.841,-43.752 ; 74.447,-43.739 74.828,-43.739 ; 74.447,-43.726 74.816,-43.726 ; 74.447,-43.713 74.803,-43.713 ; 74.447,-42.177 74.803,-42.177 ; 74.46,-43.701 74.803,-43.701 ; 74.46,-43.688 74.79,-43.688 ; 74.46,-43.675 74.778,-43.675 ; 74.46,-43.663 74.778,-43.663 ; 74.46,-43.65 74.765,-43.65 ; 74.473,-43.637 74.765,-43.637 ; 74.473,-43.624 74.752,-43.624 ; 74.473,-43.612 74.752,-43.612 ; 74.473,-43.599 74.739,-43.599 ; 74.473,-43.586 74.739,-43.586 ; 74.473,-43.574 74.727,-43.574 ; 74.473,-43.561 74.727,-43.561 ; 74.473,-42.164 74.816,-42.164 ; 74.486,-43.548 74.714,-43.548 ; 74.486,-43.536 74.701,-43.536 ; 74.486,-43.523 74.701,-43.523 ; 74.486,-43.51 74.689,-43.51 ; 74.486,-43.497 74.689,-43.497 ; 74.498,-43.485 74.676,-43.485 ; 74.498,-43.472 74.676,-43.472 ; 74.498,-43.459 74.676,-43.459 ; 74.498,-43.434 74.676,-43.434 ; 74.498,-43.421 74.676,-43.421 ; 74.498,-42.151 74.803,-42.151 ; 74.511,-43.447 74.663,-43.447 ; 74.511,-43.409 74.663,-43.409 ; 74.511,-43.396 74.663,-43.396 ; 74.511,-43.383 74.663,-43.383 ; 74.511,-42.139 74.803,-42.139 ; 74.524,-43.37 74.651,-43.37 ; 74.536,-43.358 74.638,-43.358 ; 74.536,-43.345 74.562,-43.345 ; 74.536,-42.126 74.816,-42.126 ; 74.562,-42.113 74.816,-42.113 ; 74.574,-43.345 74.6,-43.345 ; 74.587,-42.1 74.828,-42.1 ; 74.6,-42.088 74.841,-42.088 ; 74.625,-42.075 74.841,-42.075 ; 74.651,-42.062 74.841,-42.062 ; 74.676,-42.05 74.854,-42.05 ; 74.701,-42.037 74.854,-42.037 ; 74.727,-42.024 74.867,-42.024 ; 74.752,-42.012 74.867,-42.012 ; 74.79,-41.999 74.879,-41.999 ; 74.803,-42.723 75.26,-42.723 ; 74.803,-42.71 75.26,-42.71 ; 74.816,-42.989 75.26,-42.989 ; 74.816,-42.977 75.26,-42.977 ; 74.816,-42.964 75.248,-42.964 ; 74.816,-42.926 75.248,-42.926 ; 74.816,-42.913 75.248,-42.913 ; 74.816,-42.901 75.248,-42.901 ; 74.816,-42.888 75.248,-42.888 ; 74.816,-42.862 75.248,-42.862 ; 74.816,-42.85 75.235,-42.85 ; 74.816,-42.837 75.235,-42.837 ; 74.816,-42.824 75.235,-42.824 ; 74.816,-42.799 75.235,-42.799 ; 74.816,-42.786 75.235,-42.786 ; 74.816,-42.774 75.235,-42.774 ; 74.816,-42.761 75.248,-42.761 ; 74.816,-42.735 75.248,-42.735 ; 74.816,-42.697 75.26,-42.697 ; 74.816,-41.986 74.879,-41.986 ; 74.828,-43.002 75.26,-43.002 ; 74.828,-42.951 75.248,-42.951 ; 74.828,-42.939 75.248,-42.939 ; 74.828,-42.875 75.248,-42.875 ; 74.828,-42.812 75.235,-42.812 ; 74.828,-42.748 75.248,-42.748 ; 74.828,-42.685 75.273,-42.685 ; 74.828,-42.672 75.273,-42.672 ; 74.828,-42.659 75.273,-42.659 ; 74.828,-42.647 75.273,-42.647 ; 74.828,-42.634 75.273,-42.634 ; 74.828,-42.621 75.286,-42.621 ; 74.828,-42.608 75.286,-42.608 ; 74.841,-43.053 75.286,-43.053 ; 74.841,-43.04 75.286,-43.04 ; 74.841,-43.028 75.273,-43.028 ; 74.841,-43.015 75.273,-43.015 ; 74.841,-42.596 75.286,-42.596 ; 74.841,-42.583 75.286,-42.583 ; 74.841,-42.57 75.286,-42.57 ; 74.841,-42.558 75.286,-42.558 ; 74.841,-42.545 75.286,-42.545 ; 74.841,-41.974 74.892,-41.974 ; 74.854,-43.078 75.298,-43.078 ; 74.854,-43.066 75.286,-43.066 ; 74.854,-42.532 75.286,-42.532 ; 74.854,-42.52 75.286,-42.52 ; 74.854,-42.507 75.298,-42.507 ; 74.854,-42.494 75.298,-42.494 ; 74.867,-43.104 75.311,-43.104 ; 74.867,-43.091 75.311,-43.091 ; 74.867,-42.481 75.298,-42.481 ; 74.867,-42.469 75.311,-42.469 ; 74.867,-42.456 75.311,-42.456 ; 74.879,-43.218 75.362,-43.218 ; 74.879,-43.205 75.362,-43.205 ; 74.879,-43.193 75.349,-43.193 ; 74.879,-43.167 75.349,-43.167 ; 74.879,-43.155 75.336,-43.155 ; 74.879,-43.142 75.336,-43.142 ; 74.879,-43.129 75.324,-43.129 ; 74.879,-43.116 75.324,-43.116 ; 74.879,-42.443 75.324,-42.443 ; 74.879,-42.431 75.336,-42.431 ; 74.879,-42.418 75.349,-42.418 ; 74.879,-41.961 74.905,-41.961 ; 74.892,-43.282 75.451,-43.282 ; 74.892,-43.269 75.438,-43.269 ; 74.892,-43.256 75.413,-43.256 ; 74.892,-43.243 75.4,-43.243 ; 74.892,-43.231 75.374,-43.231 ; 74.892,-43.18 75.349,-43.18 ; 74.892,-42.405 75.362,-42.405 ; 74.892,-42.393 75.374,-42.393 ; 74.905,-46.126 76.416,-46.126 ; 74.905,-43.32 75.501,-43.32 ; 74.905,-43.307 75.489,-43.307 ; 74.905,-43.294 75.463,-43.294 ; 74.905,-42.38 75.387,-42.38 ; 74.905,-42.367 75.413,-42.367 ; 74.905,-41.948 74.917,-41.948 ; 74.917,-43.345 75.527,-43.345 ; 74.917,-43.332 75.514,-43.332 ; 74.917,-42.355 75.425,-42.355 ; 74.93,-43.383 75.578,-43.383 ; 74.93,-43.37 75.565,-43.37 ; 74.93,-43.358 75.552,-43.358 ; 74.93,-42.342 75.438,-42.342 ; 74.93,-42.329 75.463,-42.329 ; 74.943,-46.114 76.416,-46.114 ; 74.943,-43.409 75.603,-43.409 ; 74.943,-43.396 75.59,-43.396 ; 74.943,-42.316 75.476,-42.316 ; 74.955,-43.434 75.629,-43.434 ; 74.955,-43.421 75.616,-43.421 ; 74.955,-42.304 75.501,-42.304 ; 74.955,-42.291 75.514,-42.291 ; 74.968,-46.101 76.416,-46.101 ; 74.968,-43.459 75.717,-43.459 ; 74.968,-43.447 75.667,-43.447 ; 74.968,-42.278 75.527,-42.278 ; 74.968,-42.266 75.54,-42.266 ; 74.981,-43.472 75.768,-43.472 ; 74.981,-42.253 75.565,-42.253 ; 74.981,-42.24 75.578,-42.24 ; 74.981,-42.227 75.59,-42.227 ; 74.981,-42.215 75.603,-42.215 ; 74.981,-42.202 75.629,-42.202 ; 74.993,-46.088 76.416,-46.088 ; 74.993,-43.497 75.857,-43.497 ; 74.993,-43.485 75.819,-43.485 ; 74.993,-42.189 75.654,-42.189 ; 74.993,-42.177 75.705,-42.177 ; 74.993,-42.164 76.06,-42.164 ; 75.006,-42.151 77.229,-42.151 ; 75.019,-46.076 76.429,-46.076 ; 75.019,-43.523 75.921,-43.523 ; 75.019,-43.51 75.895,-43.51 ; 75.019,-42.139 77.216,-42.139 ; 75.032,-43.548 75.959,-43.548 ; 75.032,-43.536 75.946,-43.536 ; 75.032,-42.126 77.203,-42.126 ; 75.032,-42.113 77.203,-42.113 ; 75.044,-46.063 76.429,-46.063 ; 75.044,-43.561 76.01,-43.561 ; 75.044,-42.1 77.191,-42.1 ; 75.044,-42.088 77.178,-42.088 ; 75.057,-43.586 77.572,-43.586 ; 75.057,-43.574 77.572,-43.574 ; 75.057,-42.075 77.165,-42.075 ; 75.057,-42.062 77.153,-42.062 ; 75.057,-42.05 77.14,-42.05 ; 75.07,-43.599 77.584,-43.599 ; 75.07,-42.037 77.127,-42.037 ; 75.082,-42.024 77.102,-42.024 ; 75.095,-46.05 76.429,-46.05 ; 75.095,-43.624 77.597,-43.624 ; 75.095,-43.612 77.584,-43.612 ; 75.095,-42.012 77.089,-42.012 ; 75.108,-43.637 77.597,-43.637 ; 75.108,-41.999 77.076,-41.999 ; 75.12,-46.038 76.429,-46.038 ; 75.12,-43.663 77.61,-43.663 ; 75.12,-43.65 77.61,-43.65 ; 75.12,-41.986 77.051,-41.986 ; 75.133,-43.675 77.61,-43.675 ; 75.133,-41.974 77.038,-41.974 ; 75.133,-41.961 77.025,-41.961 ; 75.146,-46.025 76.429,-46.025 ; 75.146,-43.688 77.622,-43.688 ; 75.146,-41.948 77,-41.948 ; 75.159,-46.012 76.441,-46.012 ; 75.171,-43.701 77.622,-43.701 ; 75.171,-41.935 76.975,-41.935 ; 75.184,-45.999 76.441,-45.999 ; 75.184,-43.713 77.635,-43.713 ; 75.184,-41.923 76.949,-41.923 ; 75.197,-45.987 76.441,-45.987 ; 75.197,-43.726 77.635,-43.726 ; 75.197,-41.91 76.924,-41.91 ; 75.209,-45.974 76.441,-45.974 ; 75.209,-41.897 76.898,-41.897 ; 75.222,-43.739 77.648,-43.739 ; 75.235,-45.961 76.441,-45.961 ; 75.235,-43.752 77.648,-43.752 ; 75.235,-41.885 76.86,-41.885 ; 75.248,-45.949 76.454,-45.949 ; 75.248,-43.764 77.648,-43.764 ; 75.26,-43.777 77.66,-43.777 ; 75.26,-41.872 76.822,-41.872 ; 75.273,-47.993 76.225,-47.993 ; 75.273,-47.981 76.225,-47.981 ; 75.273,-47.968 76.225,-47.968 ; 75.273,-47.955 76.225,-47.955 ; 75.273,-47.942 76.225,-47.942 ; 75.273,-47.93 76.225,-47.93 ; 75.273,-47.917 76.225,-47.917 ; 75.273,-47.904 76.225,-47.904 ; 75.273,-47.892 76.238,-47.892 ; 75.273,-47.879 76.238,-47.879 ; 75.273,-47.866 76.238,-47.866 ; 75.273,-47.854 76.238,-47.854 ; 75.273,-47.841 76.238,-47.841 ; 75.273,-47.828 76.238,-47.828 ; 75.273,-47.816 76.238,-47.816 ; 75.273,-47.803 76.238,-47.803 ; 75.273,-47.79 76.238,-47.79 ; 75.273,-47.777 76.238,-47.777 ; 75.273,-47.765 76.238,-47.765 ; 75.273,-47.752 76.238,-47.752 ; 75.273,-47.739 76.251,-47.739 ; 75.273,-47.727 76.251,-47.727 ; 75.273,-47.714 76.251,-47.714 ; 75.273,-47.701 76.251,-47.701 ; 75.273,-47.688 76.251,-47.688 ; 75.273,-47.676 76.251,-47.676 ; 75.273,-47.663 76.251,-47.663 ; 75.273,-47.65 76.251,-47.65 ; 75.273,-47.638 76.251,-47.638 ; 75.273,-47.625 76.263,-47.625 ; 75.273,-47.612 76.263,-47.612 ; 75.273,-47.6 76.263,-47.6 ; 75.273,-47.587 76.263,-47.587 ; 75.273,-47.574 76.263,-47.574 ; 75.273,-47.561 76.263,-47.561 ; 75.273,-47.549 76.263,-47.549 ; 75.273,-47.536 76.263,-47.536 ; 75.273,-47.523 76.263,-47.523 ; 75.273,-47.511 76.263,-47.511 ; 75.273,-47.498 76.263,-47.498 ; 75.273,-47.485 76.263,-47.485 ; 75.273,-46.723 76.34,-46.723 ; 75.273,-46.711 76.34,-46.711 ; 75.273,-45.936 76.454,-45.936 ; 75.286,-48.095 76.225,-48.095 ; 75.286,-48.082 76.225,-48.082 ; 75.286,-48.069 76.225,-48.069 ; 75.286,-48.057 76.225,-48.057 ; 75.286,-48.044 76.225,-48.044 ; 75.286,-48.031 76.225,-48.031 ; 75.286,-48.019 76.225,-48.019 ; 75.286,-48.006 76.225,-48.006 ; 75.286,-47.473 76.263,-47.473 ; 75.286,-47.46 76.263,-47.46 ; 75.286,-47.447 76.263,-47.447 ; 75.286,-47.434 76.263,-47.434 ; 75.286,-47.422 76.263,-47.422 ; 75.286,-47.409 76.276,-47.409 ; 75.286,-47.396 76.276,-47.396 ; 75.286,-47.384 76.276,-47.384 ; 75.286,-47.371 76.276,-47.371 ; 75.286,-47.358 76.289,-47.358 ; 75.286,-47.346 76.289,-47.346 ; 75.286,-47.333 76.276,-47.333 ; 75.286,-47.32 76.276,-47.32 ; 75.286,-47.307 76.276,-47.307 ; 75.286,-47.295 76.276,-47.295 ; 75.286,-47.282 76.276,-47.282 ; 75.286,-47.269 76.276,-47.269 ; 75.286,-47.257 76.276,-47.257 ; 75.286,-47.244 76.276,-47.244 ; 75.286,-47.231 76.276,-47.231 ; 75.286,-47.219 76.289,-47.219 ; 75.286,-47.206 76.289,-47.206 ; 75.286,-47.193 76.289,-47.193 ; 75.286,-47.18 76.289,-47.18 ; 75.286,-47.168 76.289,-47.168 ; 75.286,-47.155 76.289,-47.155 ; 75.286,-47.142 76.302,-47.142 ; 75.286,-47.13 76.302,-47.13 ; 75.286,-47.117 76.314,-47.117 ; 75.286,-47.104 76.314,-47.104 ; 75.286,-47.092 76.314,-47.092 ; 75.286,-47.079 76.314,-47.079 ; 75.286,-47.066 76.314,-47.066 ; 75.286,-47.053 76.314,-47.053 ; 75.286,-47.041 76.314,-47.041 ; 75.286,-47.015 76.314,-47.015 ; 75.286,-47.003 76.314,-47.003 ; 75.286,-46.761 76.34,-46.761 ; 75.286,-46.749 76.34,-46.749 ; 75.286,-46.736 76.34,-46.736 ; 75.286,-45.923 76.454,-45.923 ; 75.286,-43.79 77.66,-43.79 ; 75.286,-41.859 76.784,-41.859 ; 75.298,-48.298 76.225,-48.298 ; 75.298,-48.285 76.225,-48.285 ; 75.298,-48.273 76.225,-48.273 ; 75.298,-48.26 76.225,-48.26 ; 75.298,-48.247 76.225,-48.247 ; 75.298,-48.235 76.225,-48.235 ; 75.298,-48.222 76.225,-48.222 ; 75.298,-48.209 76.225,-48.209 ; 75.298,-48.197 76.225,-48.197 ; 75.298,-48.184 76.225,-48.184 ; 75.298,-48.171 76.225,-48.171 ; 75.298,-48.158 76.225,-48.158 ; 75.298,-48.146 76.225,-48.146 ; 75.298,-48.133 76.225,-48.133 ; 75.298,-48.12 76.225,-48.12 ; 75.298,-48.108 76.225,-48.108 ; 75.298,-47.028 76.314,-47.028 ; 75.298,-46.99 76.302,-46.99 ; 75.298,-46.977 76.314,-46.977 ; 75.298,-46.965 76.314,-46.965 ; 75.298,-46.952 76.314,-46.952 ; 75.298,-46.939 76.314,-46.939 ; 75.298,-46.926 76.302,-46.926 ; 75.298,-46.914 76.314,-46.914 ; 75.298,-46.888 76.314,-46.888 ; 75.298,-46.876 76.314,-46.876 ; 75.298,-46.825 76.327,-46.825 ; 75.298,-46.812 76.327,-46.812 ; 75.298,-46.799 76.327,-46.799 ; 75.298,-46.787 76.327,-46.787 ; 75.298,-46.774 76.327,-46.774 ; 75.298,-45.91 76.454,-45.91 ; 75.298,-43.802 77.673,-43.802 ; 75.311,-48.387 76.251,-48.387 ; 75.311,-48.374 76.238,-48.374 ; 75.311,-48.362 76.238,-48.362 ; 75.311,-48.349 76.238,-48.349 ; 75.311,-48.336 76.225,-48.336 ; 75.311,-48.323 76.238,-48.323 ; 75.311,-48.311 76.238,-48.311 ; 75.311,-46.901 76.314,-46.901 ; 75.311,-46.863 76.314,-46.863 ; 75.311,-46.85 76.314,-46.85 ; 75.311,-46.838 76.314,-46.838 ; 75.311,-45.898 76.454,-45.898 ; 75.311,-43.815 77.673,-43.815 ; 75.311,-41.846 76.733,-41.846 ; 75.324,-48.514 76.302,-48.514 ; 75.324,-48.501 76.289,-48.501 ; 75.324,-48.489 76.289,-48.489 ; 75.324,-48.476 76.276,-48.476 ; 75.324,-48.463 76.276,-48.463 ; 75.324,-48.45 76.276,-48.45 ; 75.324,-48.438 76.263,-48.438 ; 75.324,-48.425 76.263,-48.425 ; 75.324,-48.412 76.251,-48.412 ; 75.324,-48.4 76.251,-48.4 ; 75.324,-45.885 76.454,-45.885 ; 75.324,-43.828 77.686,-43.828 ; 75.336,-48.578 76.34,-48.578 ; 75.336,-48.565 76.327,-48.565 ; 75.336,-48.552 76.314,-48.552 ; 75.336,-48.539 76.314,-48.539 ; 75.336,-48.527 76.302,-48.527 ; 75.336,-43.84 76.822,-43.84 ; 75.349,-48.628 76.378,-48.628 ; 75.349,-48.616 76.365,-48.616 ; 75.349,-48.603 76.352,-48.603 ; 75.349,-48.59 76.34,-48.59 ; 75.349,-45.872 76.454,-45.872 ; 75.349,-43.853 76.81,-43.853 ; 75.349,-41.834 76.67,-41.834 ; 75.362,-48.692 76.467,-48.692 ; 75.362,-48.679 76.441,-48.679 ; 75.362,-48.666 76.429,-48.666 ; 75.362,-48.654 76.416,-48.654 ; 75.362,-48.641 76.403,-48.641 ; 75.362,-45.86 76.467,-45.86 ; 75.374,-48.755 76.556,-48.755 ; 75.374,-48.743 76.543,-48.743 ; 75.374,-48.73 76.517,-48.73 ; 75.374,-48.717 76.492,-48.717 ; 75.374,-48.704 76.479,-48.704 ; 75.374,-45.847 76.467,-45.847 ; 75.374,-43.866 76.797,-43.866 ; 75.387,-48.793 76.644,-48.793 ; 75.387,-48.781 76.619,-48.781 ; 75.387,-48.768 76.568,-48.768 ; 75.387,-45.834 76.467,-45.834 ; 75.387,-43.878 76.772,-43.878 ; 75.387,-41.821 76.568,-41.821 ; 75.4,-48.819 76.67,-48.819 ; 75.4,-48.806 76.657,-48.806 ; 75.4,-43.904 76.746,-43.904 ; 75.4,-43.891 76.759,-43.891 ; 75.413,-48.844 76.67,-48.844 ; 75.413,-48.831 76.67,-48.831 ; 75.413,-45.822 76.467,-45.822 ; 75.425,-48.87 76.683,-48.87 ; 75.425,-48.857 76.683,-48.857 ; 75.425,-45.809 76.467,-45.809 ; 75.425,-43.917 76.721,-43.917 ; 75.438,-48.895 76.67,-48.895 ; 75.438,-48.882 76.67,-48.882 ; 75.438,-45.796 76.479,-45.796 ; 75.438,-43.929 76.695,-43.929 ; 75.438,-41.808 76.505,-41.808 ; 75.451,-48.908 76.657,-48.908 ; 75.451,-45.783 76.479,-45.783 ; 75.451,-43.942 76.683,-43.942 ; 75.463,-48.92 76.657,-48.92 ; 75.476,-45.771 76.479,-45.771 ; 75.476,-43.955 76.657,-43.955 ; 75.489,-45.758 76.479,-45.758 ; 75.489,-43.967 76.632,-43.967 ; 75.501,-48.933 76.644,-48.933 ; 75.501,-45.745 76.479,-45.745 ; 75.501,-41.796 76.441,-41.796 ; 75.527,-45.733 76.479,-45.733 ; 75.527,-43.98 76.619,-43.98 ; 75.54,-45.72 76.479,-45.72 ; 75.552,-45.707 76.479,-45.707 ; 75.552,-43.993 76.581,-43.993 ; 75.565,-45.695 76.492,-45.695 ; 75.565,-41.783 76.365,-41.783 ; 75.578,-45.682 76.492,-45.682 ; 75.578,-45.669 76.492,-45.669 ; 75.59,-45.657 76.492,-45.657 ; 75.59,-44.005 76.543,-44.005 ; 75.603,-45.644 76.492,-45.644 ; 75.603,-45.631 76.492,-45.631 ; 75.616,-45.618 76.492,-45.618 ; 75.616,-45.606 76.492,-45.606 ; 75.616,-41.77 76.276,-41.77 ; 75.629,-45.593 76.492,-45.593 ; 75.629,-45.58 76.505,-45.58 ; 75.629,-44.018 76.505,-44.018 ; 75.641,-45.568 76.505,-45.568 ; 75.641,-41.758 76.2,-41.758 ; 75.654,-48.946 76.378,-48.946 ; 75.654,-45.555 76.492,-45.555 ; 75.654,-45.542 76.505,-45.542 ; 75.667,-45.529 76.505,-45.529 ; 75.667,-45.517 76.505,-45.517 ; 75.679,-45.504 76.505,-45.504 ; 75.679,-45.491 76.505,-45.491 ; 75.679,-41.745 76.136,-41.745 ; 75.692,-45.479 76.505,-45.479 ; 75.692,-44.031 76.467,-44.031 ; 75.705,-45.466 76.505,-45.466 ; 75.717,-45.453 76.505,-45.453 ; 75.717,-41.732 76.048,-41.732 ; 75.73,-44.044 76.416,-44.044 ; 75.743,-45.441 76.505,-45.441 ; 75.755,-45.428 76.517,-45.428 ; 75.768,-45.415 76.517,-45.415 ; 75.781,-44.056 76.378,-44.056 ; 75.794,-45.402 76.517,-45.402 ; 75.806,-45.39 76.517,-45.39 ; 75.819,-45.377 76.517,-45.377 ; 75.832,-45.364 76.517,-45.364 ; 75.844,-45.352 76.517,-45.352 ; 75.844,-45.339 76.517,-45.339 ; 75.857,-45.326 76.53,-45.326 ; 75.857,-45.314 76.53,-45.314 ; 75.87,-45.301 76.53,-45.301 ; 75.87,-45.288 76.53,-45.288 ; 75.882,-45.276 76.53,-45.276 ; 75.882,-45.263 76.53,-45.263 ; 75.895,-45.25 76.53,-45.25 ; 75.908,-45.237 76.543,-45.237 ; 75.908,-45.225 76.543,-45.225 ; 75.921,-45.212 76.543,-45.212 ; 75.933,-45.199 76.543,-45.199 ; 75.933,-45.187 76.543,-45.187 ; 75.946,-45.174 76.543,-45.174 ; 75.959,-45.161 76.556,-45.161 ; 75.959,-45.148 76.556,-45.148 ; 75.971,-45.136 76.556,-45.136 ; 75.971,-45.123 76.556,-45.123 ; 75.984,-45.11 76.556,-45.11 ; 75.997,-45.098 76.568,-45.098 ; 75.997,-45.085 76.568,-45.085 ; 76.01,-45.072 76.568,-45.072 ; 76.022,-45.06 76.568,-45.06 ; 76.022,-45.047 76.581,-45.047 ; 76.035,-45.034 76.581,-45.034 ; 76.048,-45.021 76.581,-45.021 ; 76.048,-45.009 76.581,-45.009 ; 76.06,-44.996 76.581,-44.996 ; 76.06,-43.561 77.572,-43.561 ; 76.073,-44.983 76.594,-44.983 ; 76.073,-44.971 76.594,-44.971 ; 76.086,-44.958 76.594,-44.958 ; 76.098,-44.945 76.594,-44.945 ; 76.111,-44.933 76.594,-44.933 ; 76.111,-44.92 76.606,-44.92 ; 76.111,-42.164 77.229,-42.164 ; 76.124,-44.907 76.606,-44.907 ; 76.136,-44.895 76.594,-44.895 ; 76.136,-44.882 76.606,-44.882 ; 76.149,-44.869 76.606,-44.869 ; 76.162,-44.856 76.606,-44.856 ; 76.175,-44.844 76.606,-44.844 ; 76.187,-44.831 76.594,-44.831 ; 76.187,-42.177 77.241,-42.177 ; 76.2,-44.818 76.606,-44.818 ; 76.213,-44.806 76.606,-44.806 ; 76.213,-44.793 76.606,-44.793 ; 76.225,-44.78 76.606,-44.78 ; 76.225,-42.189 77.241,-42.189 ; 76.238,-44.767 76.619,-44.767 ; 76.251,-44.755 76.619,-44.755 ; 76.251,-42.202 77.254,-42.202 ; 76.263,-44.742 76.619,-44.742 ; 76.263,-44.069 76.314,-44.069 ; 76.276,-44.729 76.619,-44.729 ; 76.289,-44.717 76.619,-44.717 ; 76.289,-42.215 77.254,-42.215 ; 76.302,-44.704 76.619,-44.704 ; 76.302,-44.691 76.619,-44.691 ; 76.314,-44.679 76.606,-44.679 ; 76.314,-42.227 77.254,-42.227 ; 76.327,-44.666 76.594,-44.666 ; 76.327,-43.548 77.559,-43.548 ; 76.34,-44.653 76.581,-44.653 ; 76.34,-42.24 77.254,-42.24 ; 76.352,-44.64 76.556,-44.64 ; 76.365,-44.628 76.556,-44.628 ; 76.378,-44.615 76.556,-44.615 ; 76.378,-42.253 77.267,-42.253 ; 76.391,-48.946 76.403,-48.946 ; 76.403,-44.602 76.53,-44.602 ; 76.403,-42.266 77.267,-42.266 ; 76.416,-44.59 76.517,-44.59 ; 76.429,-48.946 76.441,-48.946 ; 76.429,-42.278 77.267,-42.278 ; 76.454,-48.946 76.467,-48.946 ; 76.454,-43.536 77.559,-43.536 ; 76.454,-42.291 77.279,-42.291 ; 76.479,-43.523 77.546,-43.523 ; 76.492,-48.946 76.505,-48.946 ; 76.492,-43.51 77.546,-43.51 ; 76.492,-42.304 77.279,-42.304 ; 76.505,-42.316 77.279,-42.316 ; 76.517,-48.946 76.53,-48.946 ; 76.517,-43.497 77.534,-43.497 ; 76.53,-42.329 77.279,-42.329 ; 76.543,-47.523 76.873,-47.523 ; 76.543,-47.511 76.911,-47.511 ; 76.543,-47.498 76.949,-47.498 ; 76.543,-47.485 76.987,-47.485 ; 76.543,-47.473 77.025,-47.473 ; 76.543,-47.46 77.051,-47.46 ; 76.543,-47.447 77.089,-47.447 ; 76.543,-47.434 77.114,-47.434 ; 76.543,-47.422 77.153,-47.422 ; 76.543,-47.409 77.178,-47.409 ; 76.543,-47.396 77.203,-47.396 ; 76.543,-47.384 77.241,-47.384 ; 76.543,-43.485 77.534,-43.485 ; 76.543,-42.342 77.292,-42.342 ; 76.556,-48.946 76.568,-48.946 ; 76.556,-47.587 76.632,-47.587 ; 76.556,-47.574 76.683,-47.574 ; 76.556,-47.561 76.733,-47.561 ; 76.556,-47.549 76.784,-47.549 ; 76.556,-47.536 76.822,-47.536 ; 76.556,-47.371 77.267,-47.371 ; 76.556,-47.358 77.292,-47.358 ; 76.556,-47.346 77.318,-47.346 ; 76.556,-47.333 77.343,-47.333 ; 76.556,-47.32 77.368,-47.32 ; 76.556,-47.307 77.394,-47.307 ; 76.556,-47.295 77.406,-47.295 ; 76.556,-47.282 77.432,-47.282 ; 76.556,-47.269 77.457,-47.269 ; 76.556,-47.257 77.483,-47.257 ; 76.556,-47.244 77.495,-47.244 ; 76.556,-47.231 77.521,-47.231 ; 76.556,-47.168 77.622,-47.168 ; 76.556,-47.155 77.648,-47.155 ; 76.556,-43.472 77.534,-43.472 ; 76.556,-42.355 77.292,-42.355 ; 76.568,-47.219 77.546,-47.219 ; 76.568,-47.206 77.559,-47.206 ; 76.568,-47.193 77.584,-47.193 ; 76.568,-47.18 77.61,-47.18 ; 76.568,-47.142 77.66,-47.142 ; 76.568,-47.13 77.686,-47.13 ; 76.568,-43.459 77.534,-43.459 ; 76.568,-42.393 77.305,-42.393 ; 76.568,-42.38 77.292,-42.38 ; 76.568,-42.367 77.292,-42.367 ; 76.581,-48.946 76.594,-48.946 ; 76.581,-47.117 77.699,-47.117 ; 76.581,-43.447 77.521,-43.447 ; 76.581,-42.431 77.305,-42.431 ; 76.581,-42.418 77.305,-42.418 ; 76.581,-42.405 77.305,-42.405 ; 76.581,-41.821 76.606,-41.821 ; 76.594,-47.104 77.711,-47.104 ; 76.594,-42.481 77.318,-42.481 ; 76.594,-42.469 77.318,-42.469 ; 76.594,-42.456 77.318,-42.456 ; 76.594,-42.443 77.305,-42.443 ; 76.606,-43.434 77.521,-43.434 ; 76.606,-43.421 77.521,-43.421 ; 76.606,-42.52 77.33,-42.52 ; 76.606,-42.507 77.318,-42.507 ; 76.606,-42.494 77.318,-42.494 ; 76.619,-43.409 77.508,-43.409 ; 76.619,-43.396 77.508,-43.396 ; 76.619,-42.558 77.33,-42.558 ; 76.619,-42.545 77.33,-42.545 ; 76.619,-42.532 77.33,-42.532 ; 76.632,-47.092 77.737,-47.092 ; 76.632,-43.383 77.508,-43.383 ; 76.632,-43.37 77.508,-43.37 ; 76.632,-42.608 77.343,-42.608 ; 76.632,-42.596 77.343,-42.596 ; 76.632,-42.583 77.343,-42.583 ; 76.632,-42.57 77.33,-42.57 ; 76.644,-43.358 77.508,-43.358 ; 76.644,-43.345 77.495,-43.345 ; 76.644,-43.332 77.495,-43.332 ; 76.644,-43.32 77.495,-43.32 ; 76.644,-42.697 77.356,-42.697 ; 76.644,-42.685 77.356,-42.685 ; 76.644,-42.672 77.356,-42.672 ; 76.644,-42.659 77.343,-42.659 ; 76.644,-42.647 77.343,-42.647 ; 76.644,-42.634 77.343,-42.634 ; 76.644,-42.621 77.343,-42.621 ; 76.657,-43.307 77.483,-43.307 ; 76.657,-43.294 77.483,-43.294